# Altium PCB ManInTheMiddle for  Hammond Male Pins 1455J.PcbDoc
Units mil, origin at the board's own origin, x right, y up, seen from the top; angles counter-clockwise.
Board outline 2913.39 x 1732.44 mil, 2 copper layers (Component Side, Bottom Layer), stack 12.8 mil thick; 9 components, 16 nets, 86 pads, 7 vias.
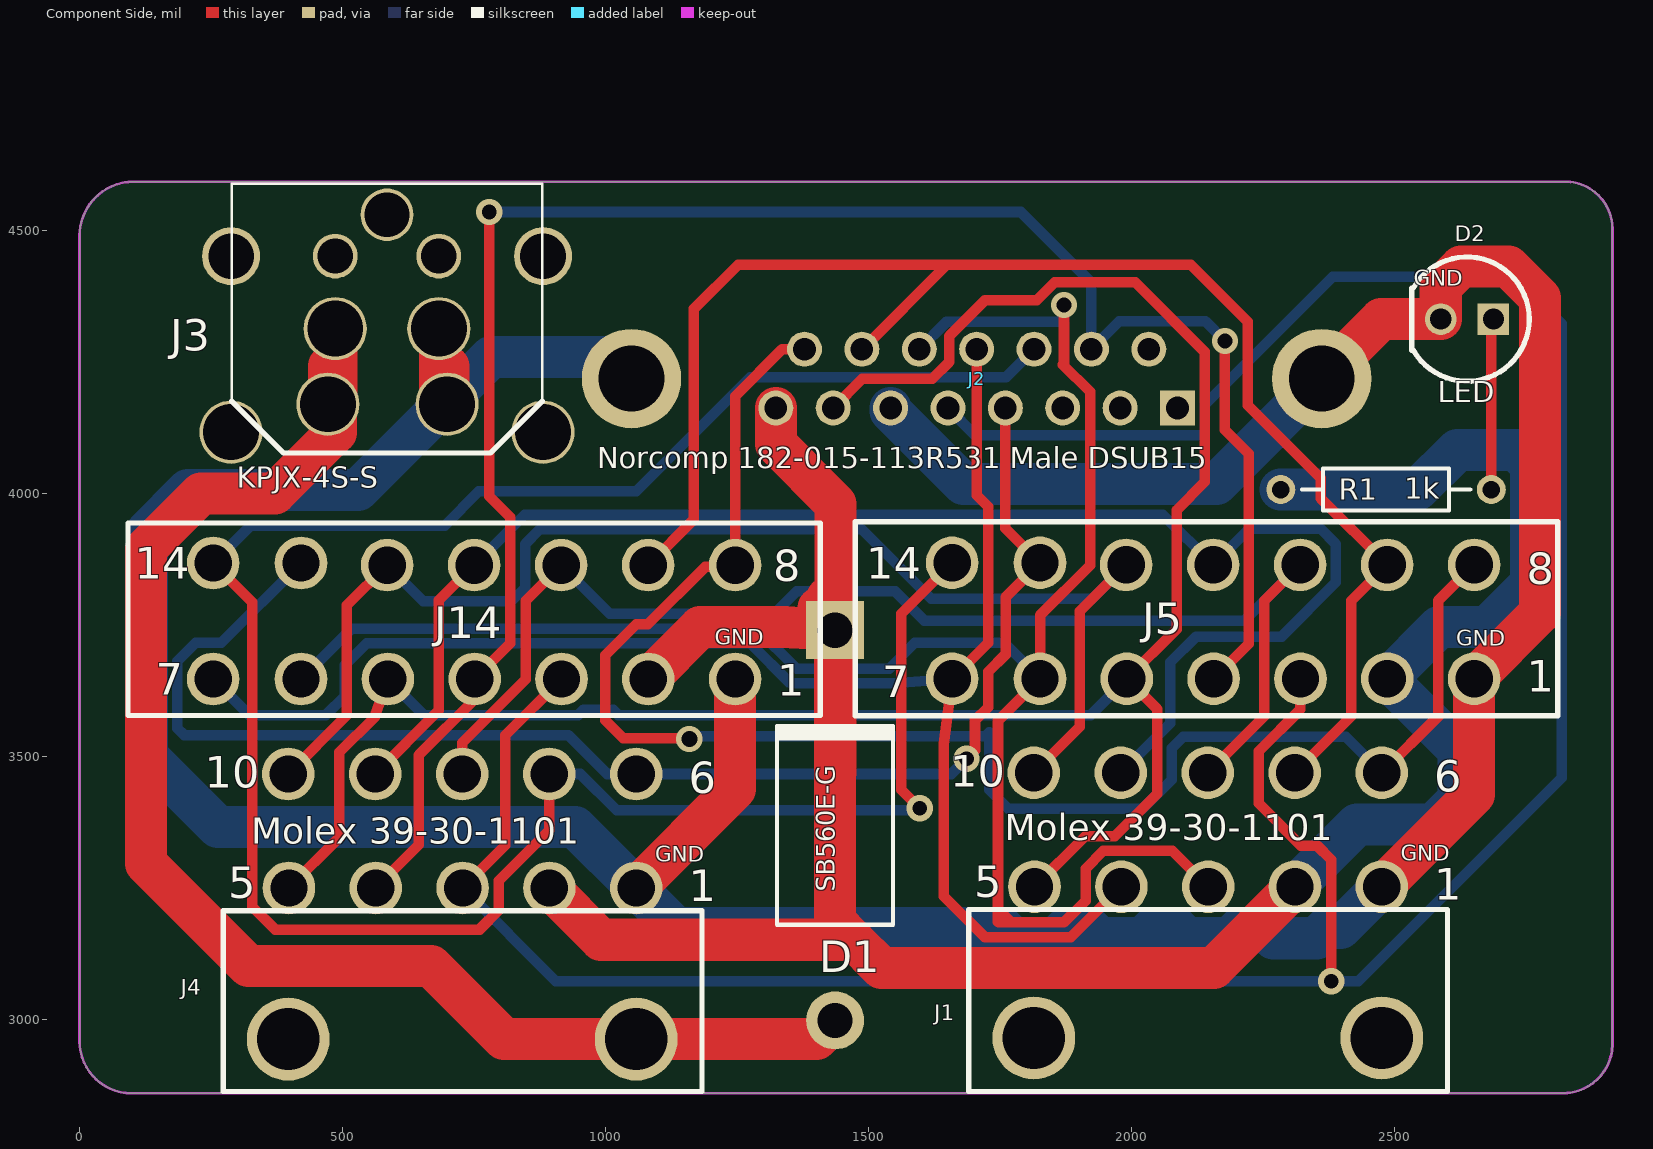
[diagram p0: Component Side view]
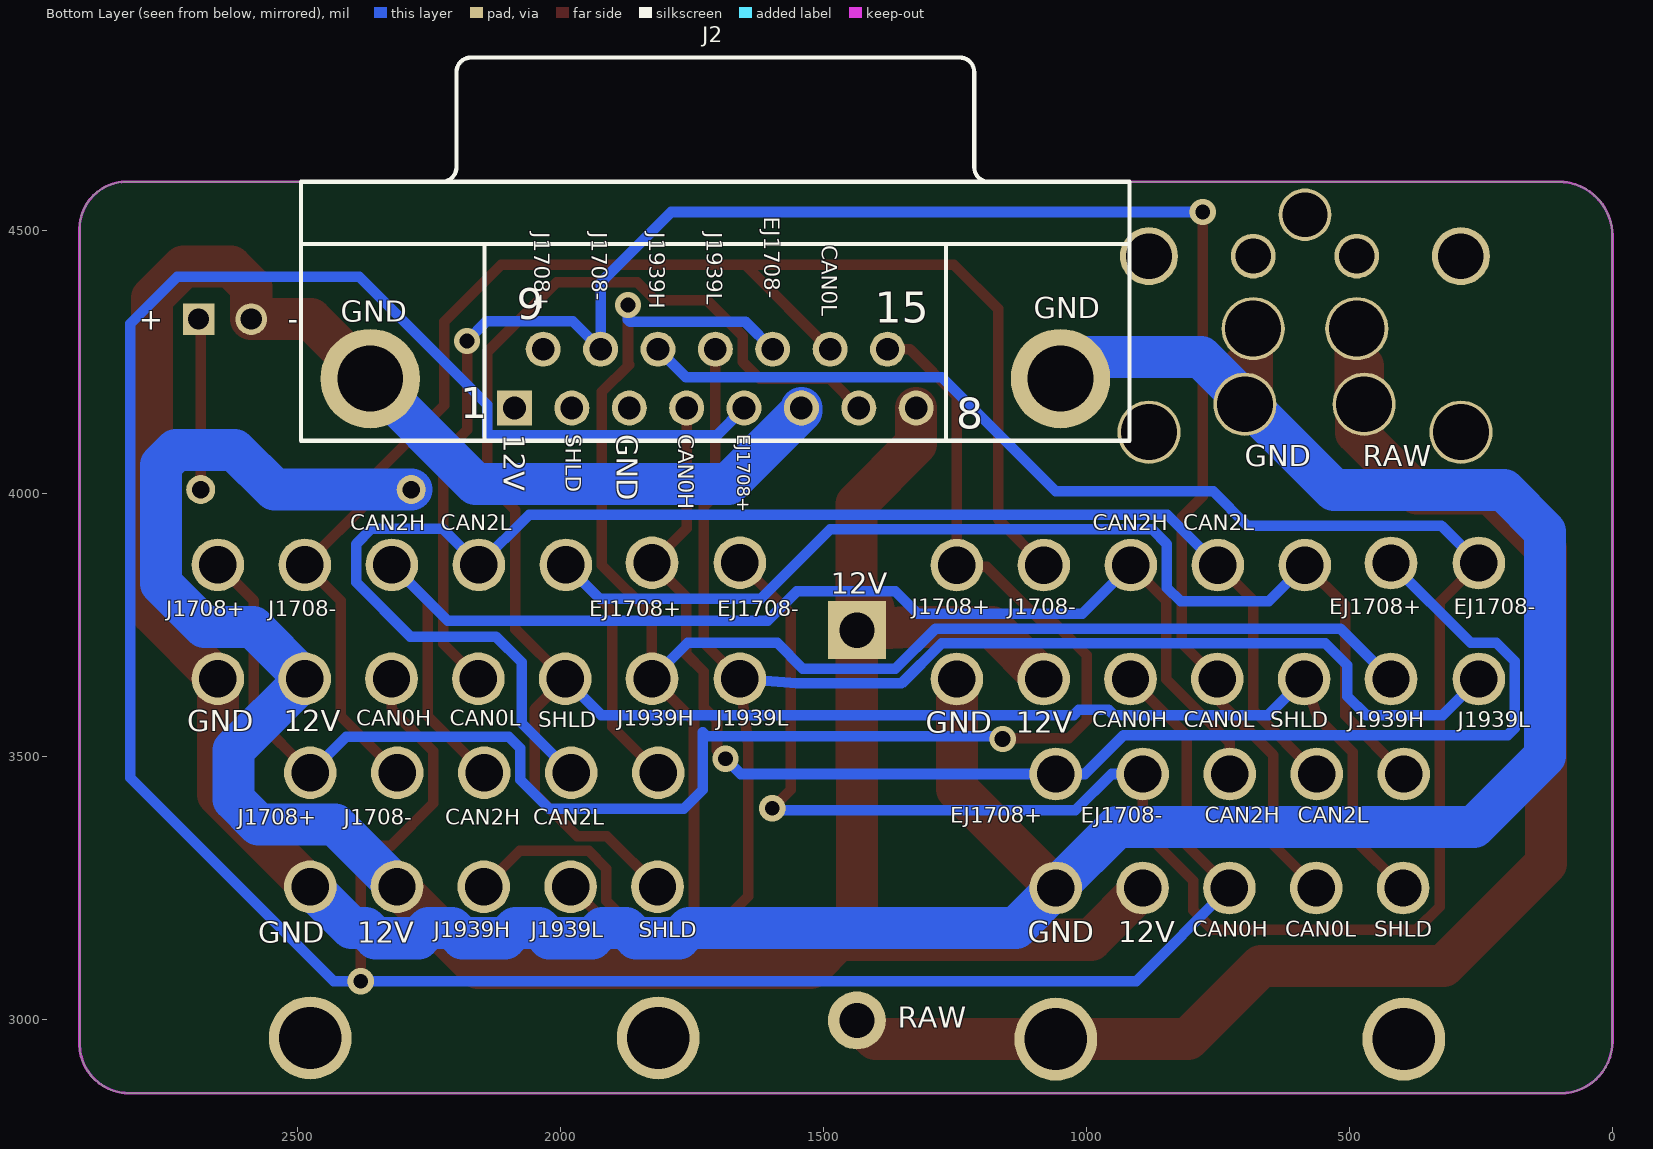
[diagram p1: Bottom Layer view, seen from below]

## Layer stack, top to bottom
Top Solder: solder mask 0.4, Solder Resist, Dk 3.5
Component Side: signal copper 1.4
Dielectric 1: core 10, FR-4, Dk 4.2
Bottom Layer: signal copper 1.4
Solder Side: solder mask 0.4, Solder Resist, Dk 3.5

## Board outline
98.61,2859.87 cw(c98.61,2958.48) 0,2958.48 0,4489.21 cw(c103.1,4489.21) 103.1,4592.31 2823.63,4592.31 cw(c2823.63,4502.57) 2913.36,4502.57 2913.36,3055.96 2913.39,3055.94 2913.39,2951.93 cw(c2819.23,2954.03) 2817.13,2859.87

## Design rules (kind name [scope] priority, off if disabled: settings)
Clearance [All] p1: gap=8 ignorepadtopadclearanceinfootprint=FALSE
PolygonConnect [All] p1: connectstyle=Relief reliefconductorwidth=10 reliefentries=4 polygonreliefangle="90 Angle" airgapwidth=10
RoutingVias [All] p1: holewidth=28 width=50 viastyle="Through Hole" minholewidth=30 minwidth=50 maxholewidth=50 maxwidth=100
SolderMaskExpansion [All] p1: expansion=4
Width Power [InNet('12V') or InNet('GND') or InNet('RAW')] p1: maxlimit=100 minlimit=30 preferedwidth=80
Width [All] p2: maxlimit=100 minlimit=20 preferedwidth=20
30 further rules are at their usual default settings.

## Classes and differential pairs
component class ManInTheMiddleCable: D1 D2 J1 J2 J4 J5 J14 R1

## Components (designator, comment, footprint, x,y, rotation, side; value= is the part's Value field where it differs from the comment)
D1 "STPS2150" DO-201AD 1436,3369 r90 top locked
D2 "LED" "LED - 5mm Through Hole" 2687,4331 r0 top value=White
J1 "10 Pos Mini-Fit Jr." "10 pos Mini-Fit Jr. R/A Header" 2475,3252.4 r0 top
J2 "Vehicle Interface Cable Connector" DSUB1.385-2H15 1705,4592 r180 top locked
J3 "Kycon KPJX-4S" KPJX-4S-S 584.42,4746.07 r0 top
J4 "10 Pos Mini-Fit Jr." "10 pos Mini-Fit Jr. R/A Header" 1058,3250 r0 top
J5 "14 Pos Mini-Fit Jr." "14 pos Mini-Fit Jr. R/A Header" 2650.42,3647.46 r0 top
J14 "14 Pos Mini-Fit Jr." "14 pos Mini-Fit Jr. R/A Header" 1246,3647 r0 top locked
R1 "330" AXIAL-0.4 2483,4007 r0 top

## Footprints (in the part's own frame and the unit in brackets; to place one, negate y for a bottom-side part, rotate by r counter-clockwise, add the part's x,y. Pads: shape width x height; smd on the part's side, far side on the other; paste and mask are expansions set on the pad)
"10 pos Mini-Fit Jr. R/A Header" [mm] "Molex 10 position Mini-Fit Jr. Right Angle Header with Pegs, Series 5569"
  round 4 hole 3: 0(-16.8,-7.3) 0(0,-7.3)
  round 2.54 hole 1.803: 1(0,0) 2(-4.191,0) 3(-8.382,0) 4(-12.573,0) 5(-16.764,0) 6(0,5.5) 7(-4.2,5.5) 8(-8.4,5.5) 9(-12.6,5.5) 10(-16.8,5.5)
  silkscreen extent -19.94,-9.89 3.18,-1.1
"14 pos Mini-Fit Jr. R/A Header" [mil] "Molex 14 position Mini-Fit Jr. Right Angle Header with Pegs, Series 5569"
  round 100 hole 71: 1(0,0) 2(-165,0) 3(-330,0) 4(-495,0) 5(-660,0) 6(-825,0) 7(-992.13,0) 8(0,216.53) 9(-165.35,216.53) 10(-330.71,216.53) 11(-496.06,216.53) 12(-661.42,216.53) 13(-825,220.47) 14(-992.13,220.47)
  silkscreen extent -1176,-70 159,299
AXIAL-0.4 [mm] "Axial Device, Thru-Hole; 2 Leads; 0.4 in Pin Spacing"
  round 1.4 hole 0.85: 1(-5.08,0) 2(5.08,0)
  silkscreen extent -4.06,-1.02 4.06,1.02
DO-201AD [mm] "Diode, Axial; Body 9.5 x 5.6 mm (LxDia. max), Lead Dia. 1.32 mm (max)"
  round 2.8 hole 1.7: 1(-9.42,0)
  rect 2.8x2.8 hole 1.7: 2(9.42,0)
  silkscreen extent -4.8,-2.8 4.9,2.8
DSUB1.385-2H15 [mm] "Connector; D Subminiature; 15 Position; Right Angle; Pitch 1.385 mm"
  rect 1.69x1.69 hole 1.09: 1(-9.695,10.92)
  round 1.69 hole 1.09: 2(-6.925,10.92) 3(-4.155,10.92) 4(-1.385,10.92) 5(1.385,10.92) 6(4.155,10.92) 7(6.925,10.92) 8(9.695,10.92) 9(-8.31,8.08) 10(-5.54,8.08) 11(-2.77,8.08) 12(0,8.08) 13(2.77,8.08) 14(5.54,8.08) 15(8.31,8.08)
  round 4.8 hole 3.18: 16(-16.66,9.5) 17(16.66,9.5)
KPJX-4S-S [mm] "Kycon 4-pin PCB mount Shieled DC power jack"
  round 3.048 hole 2.7: 0(-7.53,-16) 0(7.53,-16) 1(-2.858,-14.65) 2(2.9,-14.65) 3(-2.5,-11) 4(2.5,-11)
  round 2.8 hole 2.2: 0(-7.53,-7.5) 0(7.53,-7.5)
  round 2.159 hole 1.7: 0(-2.5,-7.5) 0(2.5,-7.5)
  round 2.54 hole 2.159: 0(0,-5.5)
  silkscreen extent -7.5,-17 7.5,-4
"LED - 5mm Through Hole" [mil] "Vishay TLCS510 Ultrabright LED, Ø 5 mm Untinted Non-Diffused Package"
  rect 60x60 hole 40: 1(0,0)
  round 60 hole 40: 2(-100,0)
  silkscreen extent -155,-118 68,118

## Part data
D1: library part "Diode 1N4003", "Schottky Diodes & Rectifiers 2.0 Amp 150 Volt", Manufacturer=STMicroelectronics, Supplier Part Number 1=511-STPS2150, PartNumber=STPS2150, Supplier 1=Mouser
D2: library part "SMT LED", "LED COOL WHITE CLR 4.8MM RND T/H", Manufacturer="Cree Inc.", PartNumber=C535A-WJN-CT0W0231, Supplier Part Number 1=C535A-WJN-CT0W0231-ND, Supplier 1=Digi-Key
J1 J4: library part "10 Pos Header", "10 Positions Header - Shrouded Connector 0.165in (4.20mm) Through Hole - Right Angle Gold", Manufacturer=Molex, PartNumber=39-30-1102, Supplier Part Number 1=WM21367-ND, Supplier 1=Digi-Key
J2: library part "D Connector 15", "Receptacle Assembly, 15 Position, Right Angle", Manufacturer="Amphenol FCI", PartNumber=D15S33E4GV00LF, Supplier Part Number 1=609-1498-ND, Supplier 1=Digi-Key
J3: library part "Power Entry Jack - 4 Pin", "DC Power Connectors 4P JACK SKT SHIELDED SNAP AND LOCK", Manufacturer=Kycon, PartNumber=KPJX-4S-S, Supplier Part Number 1=806-KPJX-4S-S, Supplier 1=Mouser
J5 J14: library part "14 Pos Header", Manufacturer=Molex, PartNumber=39-30-1140, Supplier 1=Digi-Key, Supplier 2=Mouser, Supplier Part Number 2=538-39-30-1140
R1: library part Res2, "RES 330 OHM 1/4W 1% AXIAL", Manufacturer="Stackpole Electronics Inc.", PartNumber=RNMF14FTC330R, Supplier Part Number 1=S330CACT-ND, Supplier 1=Digi-Key

## Via types
v1: diameter 50, hole 28, Component Side to Bottom Layer, 6 vias
v2: diameter 50, hole 30, Component Side to Bottom Layer, 1 vias

## Nets (pads, with @x,y where several pads share a name; then routed paths per layer and width w, separated by ;. In a path a pad name is that pad's centre, name@x,y a point inside that pad or via, vN(x,y) a via of type N, cw(c..) or ccw(c..) an arc to the next point about the centre after c; other vN are vias at no path point)
12V: D1.2 J1.2 J2.8 J4.2 J5.2 J14.2 R1.1 | length 5413.2
  Component Side w80: J4.2 991.37,3151.63 1436,3151.63 ; J14.2 1179.63,3745.63 1341.32,3745.63 1353.89,3744.86 D1.2 1436,3186.06 ; J2.8 1323.31,4093.69 1437,3980 1437,3805.87 ; D1.2@1404.87,3782.28 1437,3805.87 ; 1421.41,3802.22 1437,3805.87 ; J1.2 2155.6,3098 1524.06,3098 1470.43,3151.63 ; 1436,3151.63 1436,3186.06 ; 1436,3151.63 1470.43,3151.63 ; 1436,3186.06 1436.89,3739.86 1437,3805.87 ; 1436,3186.06 1470.43,3151.63
  Bottom Layer w80: R1.1 2542.85,4007 2618.48,4082.63 2729.85,4082.63 2758.85,4053.63 2758.85,3828.63 2675.85,3745.63 2583.58,3745.63 J5.2 2620.85,3512.03 2620.85,3418.63 2572.85,3370.63 2428.23,3370.63 J1.2
CAN0H: J2.5 J4.3 J5.3 J14.3 | length 5726.8
  Component Side w20: J4.3 809.17,3331.17 809.17,3540.17 J14.3 ; J5.3 2320.42,3589.2 2240.85,3509.63 2240.85,3410.63 2320.85,3330.63 2351.85,3330.63 2378.85,3303.63 v1(2378.85,3072.63)
  Bottom Layer w20: J4.3 905.37,3072.63 v1(2378.85,3072.63) 2429.85,3072.63 2816.85,3459.63 2816.85,4322.63 2727.85,4411.63 2381.85,4411.63 2138.85,4168.63 2138.85,4110.63 1701.92,4110.63 J2.5
CAN0L: J2.10 J4.4 J5.4 J14.4 | length 3713.3
  Component Side w20: J4.4 644.85,3331.85 644.85,3502.63 751,3608.78 J14.4 818.85,3714.85 818.85,3954.63 778.85,3994.63 v1(778.85,4534.63) ; J5.4 2222.35,3714.4 2222.35,3878.63 2222.35,4075.56 2176.85,4121.06 v1(2176.85,4289.63)
  Bottom Layer w20: v1(778.85,4534.63) 1789.11,4534.63 1923.11,4400.63 J2.10 1975.85,4326.63 2139.85,4326.63 v1(2176.85,4289.63)
CAN2H: J1.8 J4.8 J5.10 J14.10 | length 2470.3
  Component Side w20: J4.8 727.29,3526.07 847.85,3646.63 847.85,3796.09 J14.10 ; J1.8 2251.71,3576.36 2251.71,3796 J5.10
  Bottom Layer w20: J14.10 1007.83,3771 1320.22,3771 1362.85,3813.63 1549.85,3813.63 1605.85,3757.63 2213.34,3757.63 J5.10
CAN2L: J1.9 J4.9 J5.11 J14.11 | length 2931.8
  Component Side w20: J4.9 682.85,3587.45 682.85,3796.45 J14.11
  Bottom Layer w20: J14.11 845.94,3959.54 2058.82,3959.54 J5.11 2222.98,3932.63 2358.85,3932.63 2387.85,3903.63 2387.85,3831.21 2284.48,3727.84 2122.06,3727.84 2072.85,3678.63 2072.85,3562.85 J1.9
EJ1708+: J2.4 J4.6 J5.13 J14.13 | length 2739.2
  Component Side w20: v1(1685.85,3495.63) 1701.85,3511.63 1701.85,3568.63 1726.85,3593.63 1726.85,3660.63 1759.85,3693.63 1759.85,3802.37 J5.13 1759.53,3933.83 J2.4
  Bottom Layer w20: J14.13 269.16,3715.63 220.85,3715.63 185.87,3680.66 185.87,3553.6 198.85,3540.63 928.85,3540.63 1002.94,3466.54 J4.6 1656.75,3466.54 v1(1685.85,3495.63)
EJ1708-: J2.11 J4.7 J5.14 J14.14 | length 4472.9
  Component Side w20: J14.14 328.58,3792.76 328.58,3214.42 372,3171 760.22,3171 796.85,3207.63 796.85,3263.63 892.65,3359.43 J4.7 ; v1@1596.85,3397.63 v1(1596.85,3401.63) ; v1@1598.85,3399.63 v1(1596.85,3401.63) ; J5.14 1561.85,3771.5 1561.85,3436.63 v1(1596.85,3401.63)
  Bottom Layer w20: J14.14 325.03,3938.63 693.85,3938.63 758.85,4003.63 1057.85,4003.63 1274.85,4220.63 1760.79,4220.63 J2.11 ; J4.7 951.94,3466.54 1020.85,3397.63 v1@1596.85,3397.63
GND: D2.2 J1.1 J2.6 J2.16 J2.17 J3.2 J3.4 J4.1 J5.1 J14.1 | length 7553.1
  Component Side w80: J3.2@685,4183.05 J3.4@685,4256.38 ; J3.4@685,4321.21 J3.4@685,4256.38 ; J3.2@700.75,4177.5 700.75,4240.63 J3.4@685,4256.38 ; J4.1 1246,3438 J14.1 ; J2.16 2473.92,4331 D2.2 2587,4392 2626,4431 2716,4431 2776,4371 2776,3773.05 J5.1 2650.42,3427.82 J1.1
  Bottom Layer w80: J2.17 1008.08,4259 782.25,4259 529.39,4006.15 206.34,4006.15 127.87,3927.68 127.87,3501.13 263,3366 942,3366 J4.1 1134,3174 1754.81,3174 1774.41,3154.4 1855.59,3154.4 1875.19,3174 1919.81,3174 1939.41,3154.4 2020.59,3154.4 2040.19,3174 2084.81,3174 2104.41,3154.4 2185.59,3154.4 2205.19,3174 2249.81,3174 2269.41,3154.4 2350.59,3154.4 2370.19,3174 2396.6,3174 J1.1 ; J2.6 1541.42,4156.2 1679.62,4018 2160.92,4018 J2.16
J1708+: J1.6 J2.15 J5.8 J14.8 | length 3153.6
  Component Side w20: v2(1159,3533) 1157.46,3534.54 1033.47,3534.54 999,3569 999,3691.86 1058.14,3751 1080,3751 1189,3860 J14.8@1262,3860 ; J14.8 1246,4184.78 1335.11,4273.89 J2.15 ; J1.6 2581.85,3575.79 2581.85,3795.43 J5.8
  Bottom Layer w20: v2(1159,3533) 1164.63,3538.63 1721.85,3538.63 1728.85,3545.63 1728.85,3436.63 1764.85,3400.63 2020.85,3400.63 2075.85,3455.63 2075.85,3515.63 2097.85,3537.63 2406.31,3537.63 J1.6
J1708-: J1.7 J2.14 J5.9 J14.9 | length 2922.4
  Component Side w20: J14.9 1167.74,3950.63 1167.74,4350.52 1251.72,4434.5 1648.5,4434.5 ; J2.14@1487.39,4273.39 1648.5,4434.5 ; J1.7 2416.85,3576.14 2416.85,3795.79 J5.9 2358.85,3990.21 2358.85,4028.63 2219.85,4167.63 2219.85,4326.15 2111.5,4434.5 1648.5,4434.5
J1939H: J1.3 J2.13 J5.6 J14.6 | length 3673.9
  Component Side w20: v1(1871,4358) 1871,4246.78 1868.85,4244.63 1920.85,4192.63 1920.85,3863.63 1825.42,3768.2 J5.6 1745.58,3567.63 1745.58,3209.67 ; J1.3 2077,3320.4 1945.85,3320.4 1912,3286.55 1912,3225.55 1870.85,3184.4 1770.85,3184.4 ; 1745.58,3209.67 1745.58,3185.82 1747,3184.4 1770.85,3184.4 ; 1745.58,3209.67 1770.85,3184.4
  Bottom Layer w20: J14.6 517,3743 1286.48,3743 1362.85,3666.63 1538.63,3666.63 1587.63,3715.63 1757.25,3715.63 J5.6 ; J2.13 1647.68,4325.63 1866.85,4325.63 1871,4329.78 v1(1871,4358)
J1939L: J1.4 J2.12 J5.7 J14.7 | length 3042.6
  Component Side w20: J2.12 1705,3996.48 1726.85,3974.63 1726.85,3716.02 J5.7 1642.85,3523.48 1642.85,3234.4 1720.85,3156.4 1884,3156.4 J1.4
  Bottom Layer w20: J14.7 322.24,3578.63 468,3578.63 504,3614.63 504,3673.15 545.85,3715 1274.88,3715 1351.25,3638.63 1550.23,3638.63 J5.7
NetD2_1: D2.1 R1.2 | length 326.7
  Component Side w20: R1.2@2683,4006 R1.2 2683,4327 D2.1
RAW: D1.1 J3.1 J3.3 J4.0@1058,2962.6 | length 2803.8
  Component Side w80: J3.1@474.06,4177.5 474.06,4241.63 J3.3@488.15,4255.72 ; J3.3@488.15,4321.21 J3.3@488.15,4255.72 ; D1.1 1400.46,2962.6 1058,2962.6 806.88,2962.6 667.85,3101.63 320.85,3101.63 126,3296.48 126,3895 231,4000 371,4000 486.89,4115.89 486.89,4164.67 488.15,4165.93 J3.3@488.15,4255.72
SHLD: J1.5 J2.7 J4.5 J5.5 J14.5 | length 4284.5
  Component Side w20: J4.5 493.85,3345.85 493.85,3507.63 561,3574.78 J14.5 ; J2.7 1487.91,4217.63 1620.85,4217.63 1652.85,4249.63 1652.85,4298.89 1720.85,4366.89 1819.08,4366.89 1853.19,4401 2006.48,4401 2138.85,4268.63 2138.85,4021.63 2085,3967.78 ; J1.5 1911,3348.4 1967.62,3348.4 2047.85,3428.63 2047.85,3590.03 J5.5 2084.85,3741.9 ; 2084.85,3741.9 2085,3742.05 2085,3967.78 ; 2084.85,3741.9 2084.85,3967.63 2085,3967.78
  Bottom Layer w20: J14.5 654.37,3578.63 947.82,3578.63 957.82,3588.63 1014.18,3588.63 1024.18,3578.63 1921.58,3578.63 J5.5
Sync_in: J1.10 J4.10 J5.12 J14.12 | length 2562.2
  Component Side w20: J4.10 508,3577.95 508,3786.95 J14.12 ; J1.10 1900.69,3556.05 1900.69,3775.69 J5.12
  Bottom Layer w20: J14.12 653.49,3794.63 820.85,3794.63 846.85,3820.63 846.85,3903.63 874.75,3931.54 1486.94,3931.54 1618.85,3799.63 1924.63,3799.63 J5.12
pads on no net: J1.0 J2.1 J2.2 J2.3 J2.9 J3.0 J4.0@396.58,2962.6

## Keep-outs
Keep-Out Layer:
  the board outline again, w5

## Silkscreen, mask and mechanical layers (free items; w line width, h text height)
Top Overlay:
  text "GND" at 2536,4394 h30
  text "LED" at 2581,4173 h40
  text "Norcomp 182-015-113R531 Male DSUB15" at 984,4048 h40
  text "KPJX-4S-S" at 299,4011 h40
  text "1k" at 2518,3990 h40
  text "GND" at 1207,3712 h30
  text "GND" at 2616,3710 h30
  text "GND" at 2511,3302 h30
  text "GND" at 1094,3300 h30
  text "SB560E-G" at 1447,3243 h60 r90
Bottom Overlay:
  text "EJ1708-" at 1612.2,4525.98 h30 r90
  text "J1939L" at 1721.4,4495.99 h30 r90
  text "J1939H" at 1830.6,4495.99 h30 r90
  text "J1708-" at 1939.8,4495.99 h30 r90
  text "J1708+" at 2049,4495.99 h30 r90
  text "CAN0L" at 1503,4471 h30 r90
  text "GND" at 1100,4333 h40
  text "GND" at 2417,4326 h40
  text "EJ1708+" at 1663,4112 h25 r90
  text "CAN0H" at 1775.25,4112 h30 r90
  text "GND" at 1892.5,4112 h40 r90
  text "SHLD" at 1989.75,4112 h30 r90
  text "12V" at 2107,4112 h40 r90
  text "RAW" at 475,4051 h40
  text "GND" at 699,4051 h40
  text "CAN2L" at 816,3930 h30
  text "CAN2H" at 988,3930 h30
  text "CAN2L" at 2227,3930 h30
  text "CAN2H" at 2399,3930 h30
  text "12V" at 1486,3809 h40
  text "EJ1708-" at 302,3770 h30
  text "EJ1708+" at 538,3770 h30
  text "J1708-" at 1149,3770 h30
  text "J1708+" at 1332,3770 h30
  text "EJ1708-" at 1701,3766 h30
  text "EJ1708+" at 1945,3766 h30
  text "J1708-" at 2555,3766 h30
  text "J1708+" at 2749,3766 h30
  text "J1939L" at 1703,3558 h30
  text "J1939H" at 1891,3558 h30
  text "CAN0L" at 2210.17,3558 h30
  text "CAN0H" at 2387.55,3558 h30
  text "J1939L" at 294,3555 h30
  text "J1939H" at 503,3555 h30
  text "SHLD" at 650,3555 h30
  text "CAN0L" at 815,3555 h30
  text "CAN0H" at 989,3555 h30
  text "SHLD" at 2042,3555 h30
  text "12V" at 2524.95,3548 h40
  text "GND" at 2709,3548 h40
  text "12V" at 1134,3545 h40
  text "GND" at 1305,3545 h40
  text "CAN2L" at 598,3374 h30
  text "CAN2H" at 775,3374 h30
  text "EJ1708-" at 1011,3374 h30
  text "EJ1708+" at 1259,3374 h30
  text "CAN2L" at 2051,3370 h30
  text "CAN2H" at 2218.67,3370 h30
  text "J1708-" at 2411.33,3370 h30
  text "J1708+" at 2613,3370 h30
  text "SHLD" at 453,3157 h30
  text "CAN0L" at 622,3157 h30
  text "CAN0H" at 798,3157 h30
  text "SHLD" at 1851,3156 h30
  text "J1939L" at 2056,3156 h30
  text "J1939H" at 2240,3156 h30
  text "12V" at 939,3147 h40
  text "GND" at 1111,3147 h40
  text "12V" at 2385.75,3146 h40
  text "GND" at 2574,3146 h40
  text "RAW" at 1358,2984 h40

## Dimensions
1049.09,4217.99 to 2823.63,4592.31 on Mechanical 1
2360.9,4217.99 to 1049.09,4217.99 on Mechanical 1
0,2958.48 to 2913.39,2951.93 on Mechanical 1

## Text inside footprints (layer, text, board x,y; h text height)
D2: Bottom Overlay "-" at 2498.02,4311.32 h40; Bottom Overlay "+" at 2753.93,4311.32 h40
J1: Top Overlay "Molex 39-30-1101" at 1758,3341 h50; Top Overlay "5" at 1700,3232.4 h60; Top Overlay "10" at 1655,3442.4 h60; Top Overlay "6" at 2575,3432.4 h60; Top Overlay "1" at 2575,3227.4 h60
J2: Bottom Overlay "9" at 2082.9,4330.98 h59.06; Bottom Overlay "15" at 1401.9,4323.98 h59.06; Bottom Overlay "8" at 1247,4122.89 h59.06; Bottom Overlay "1" at 2190,4142.89 h59.06
J3: Mechanical 1 "Edge" at 444.42,4616.07 h60
J4: Top Overlay "Molex 39-30-1101" at 326,3334 h50; Top Overlay "5" at 283,3230 h60; Top Overlay "10" at 238,3440 h60; Top Overlay "6" at 1158,3430 h60; Top Overlay "1" at 1158,3225 h60
J5: Top Overlay "14" at 1495.42,3837.46 h60; Top Overlay "8" at 2750.42,3827.46 h60; Top Overlay "7" at 1525.42,3612.46 h60; Top Overlay "1" at 2750.42,3622.46 h60
J14: Top Overlay "14" at 105,3838 h60; Top Overlay "8" at 1318,3833 h60; Top Overlay "7" at 145,3617 h60; Top Overlay "1" at 1326,3615 h60